# Altium PCB 模电.PcbDoc
Units mil, origin at the board's own origin, x right, y up, seen from the top; angles counter-clockwise.
Board outline 3910.01 x 3450.03 mil, 2 copper layers (Top Layer, Bottom Layer); 18 components, 14 nets, 46 pads, 0 vias.
Unrouted connection lines stored in the file: 1.
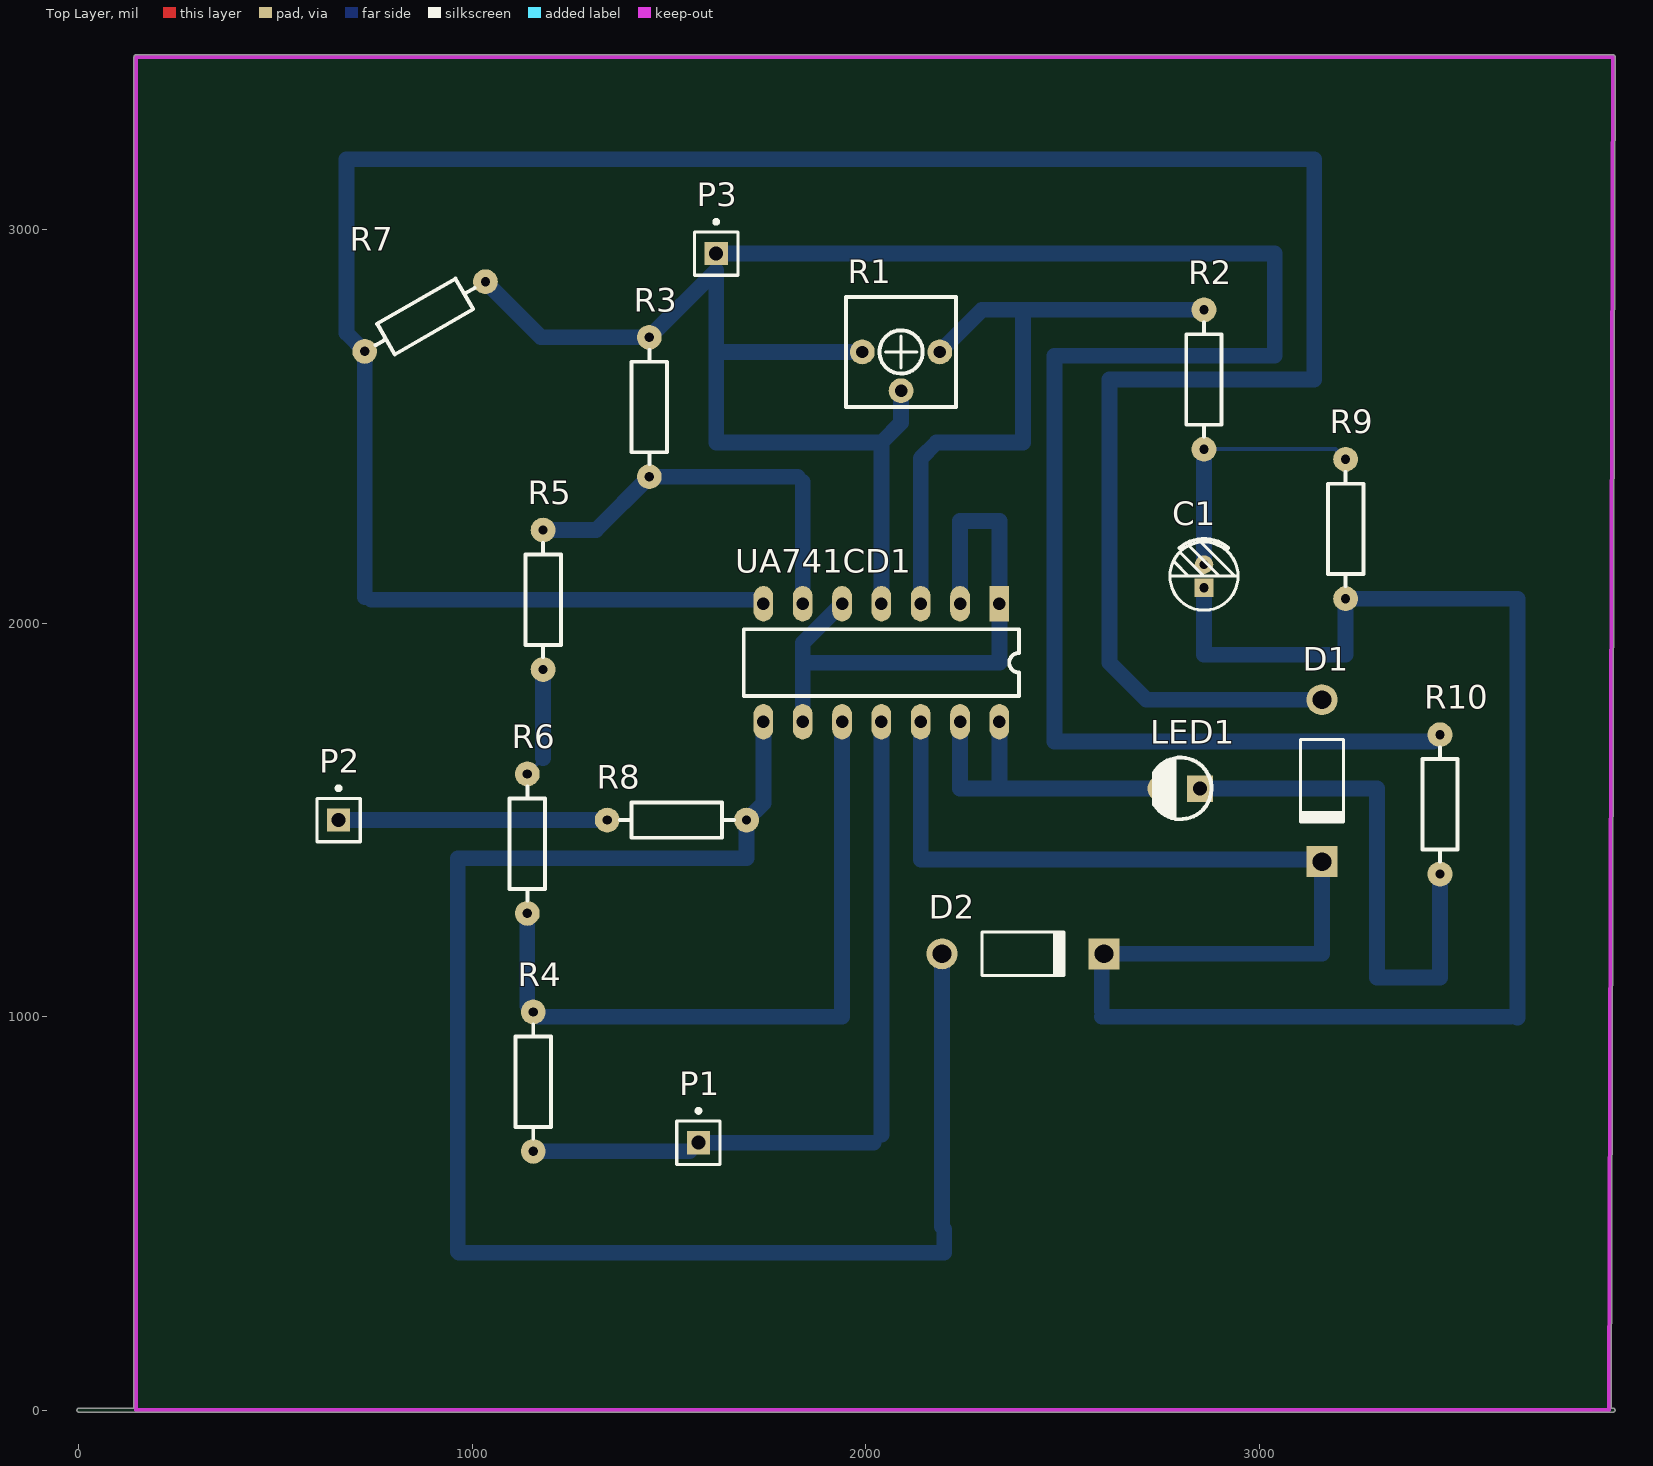
[diagram p0: Top Layer view]
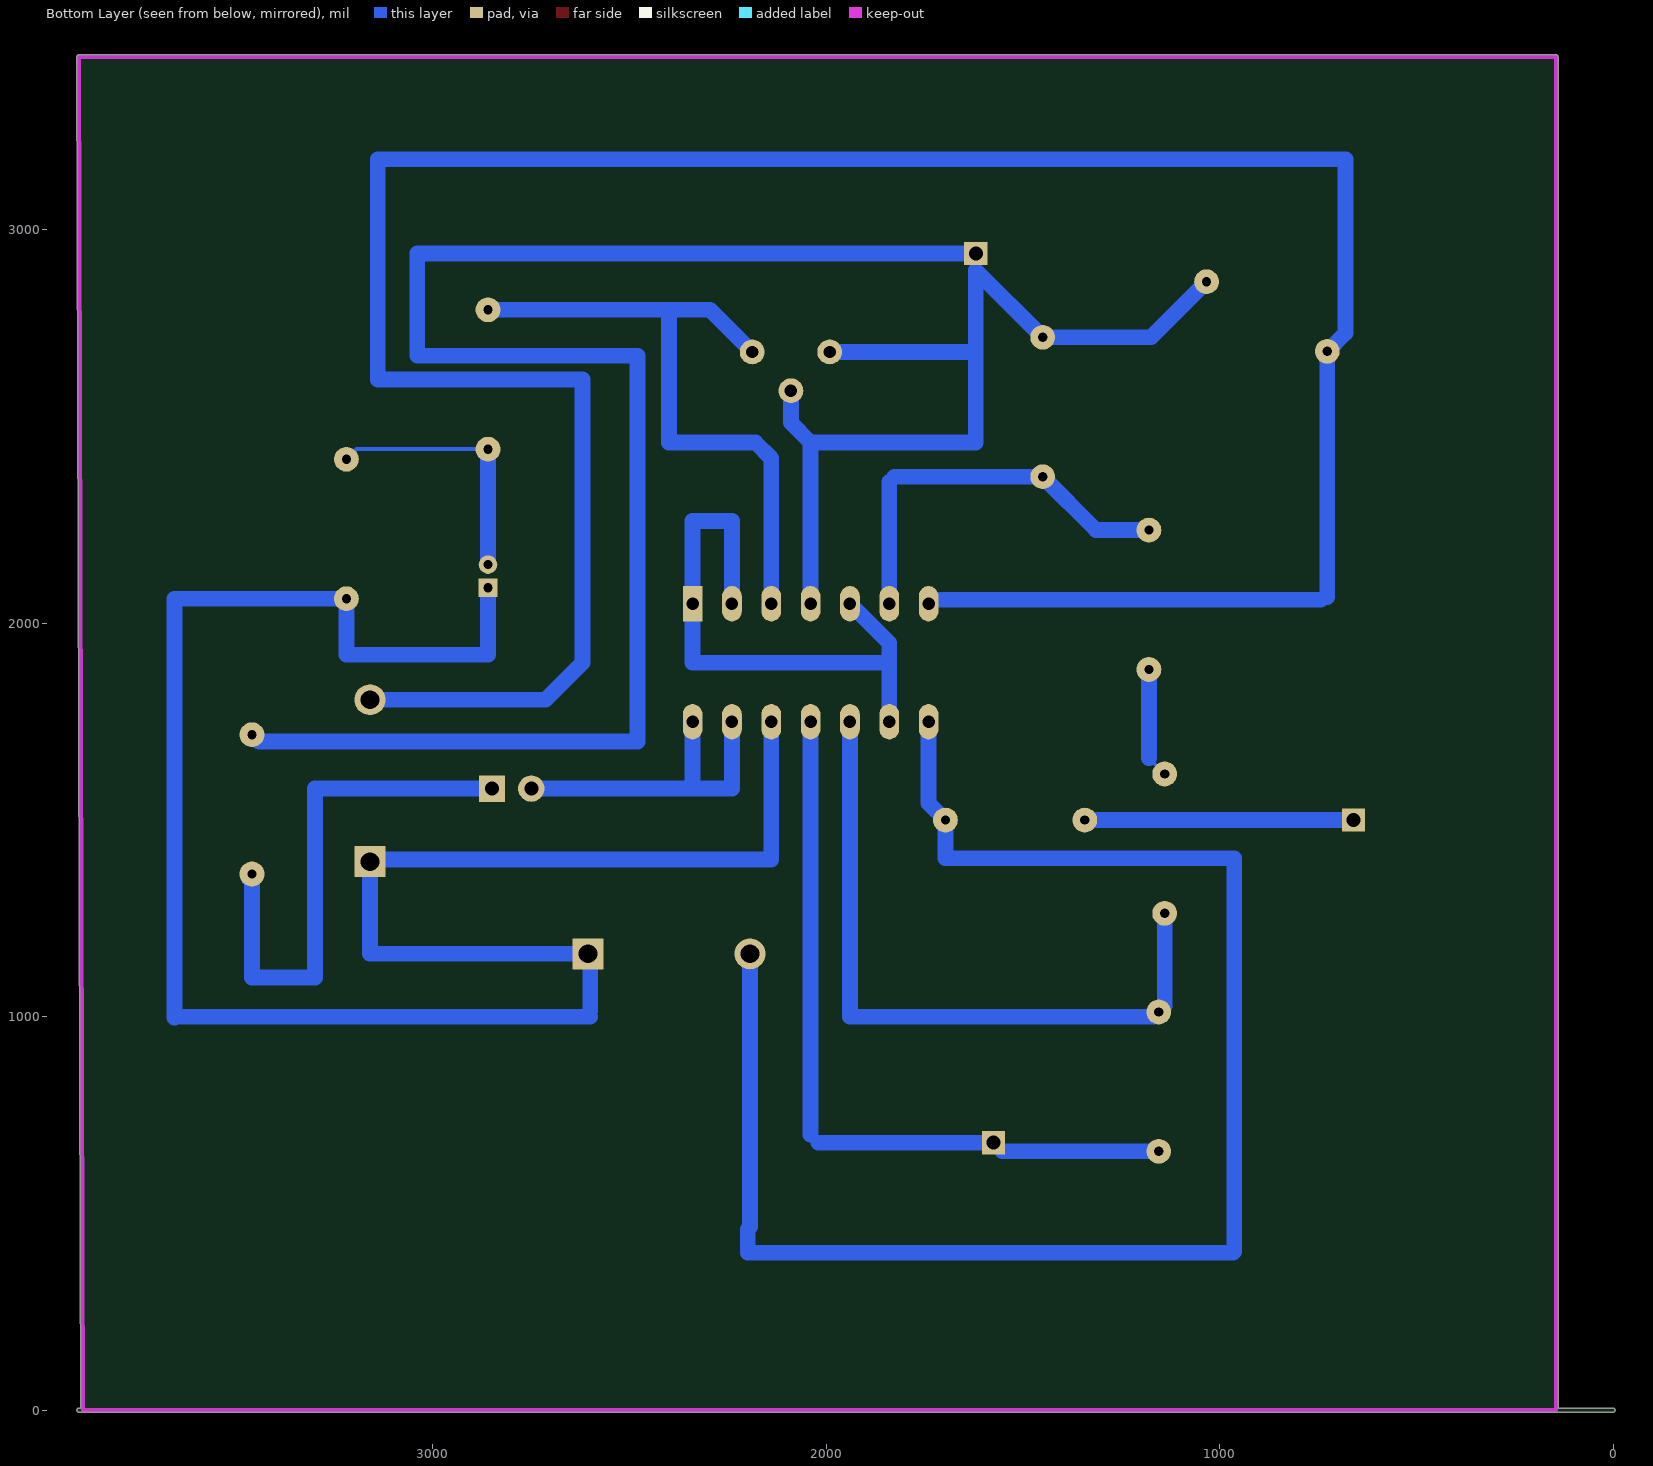
[diagram p1: Bottom Layer view, seen from below]
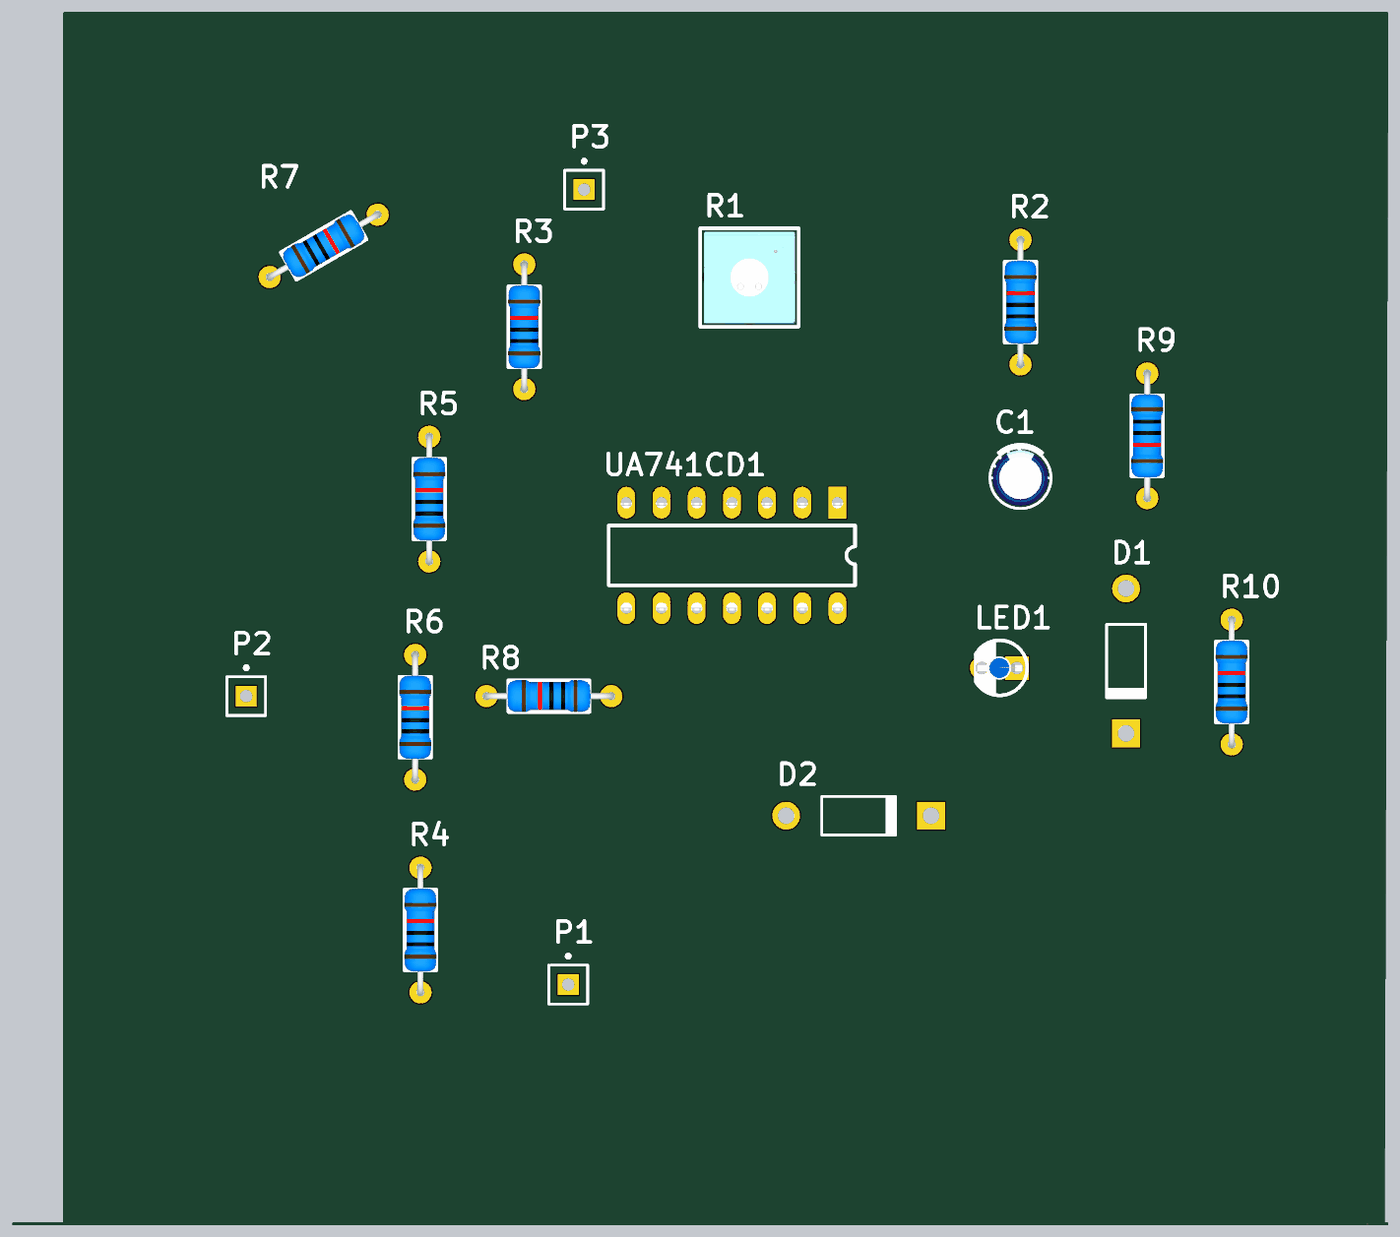
[diagram p2: 3D render of the assembled board from above, using the file's embedded part models]

## Layer stack, top to bottom
Top Layer: signal copper 1.4
Dielectric: dielectric 12.6, FR-4, Dk 4.8
Bottom Layer: signal copper 1.4

## Board outline
0,-5.01 cw(c0,0) 0,5.01 139.98,5.01 139.98,3440 cw(c145,3440) 145,3445.02 3900,3445.02 cw(c3900,3440) 3905.02,3440 cw(c3900,3440) 3905.02,3439.99 3895.03,5.01 3900,5.01 cw(c3900,0) 3905.02,0 cw(c3900,0) 3900,-5.01

## Design rules (kind name [scope] priority, off if disabled: settings)
Clearance [All] p1: gap=10
PolygonConnect [All] p1: connectstyle=Relief reliefconductorwidth=10 reliefentries=4 polygonreliefangle="90 Angle"
RoutingVias [All] p1: holewidth=28 width=50 viastyle="Through Hole" minholewidth=28 minwidth=50 maxholewidth=28 maxwidth=50
SilkscreenOverComponentPads [All] p1: minsilkscreentomaskgap=10
SolderMaskExpansion [All] p1: expansion=4
TestPointUsage FabricationTestPointUsage [All] p1: valid=0 allowmultiple=FALSE
Testpoint FabricationTestpoint [All] p1: side=3 testpointundercomponent=TRUE minsize=40 maxsize=100 preferedsize=60 minholesize=0 maxholesize=40 preferedholesize=32 testpointgrid=1 style=297 order=0123456789
Width [All] p1: maxlimit=10 minlimit=10 preferedwidth=10
23 further rules are at their usual default settings.

## Classes and differential pairs
component class 模电: C1 D1 D2 LED1 P1 P2 R1 R2 R3 R4 R5 R6 R7 R8 R9 R10 UA741CD1

## Components (designator, comment, footprint, x,y, rotation, side; value= is the part's Value field where it differs from the comment)
C1 "1uF" "CAP 1.5*4*8" 2860,2120 r90 top
D1 "Diode 1N4001" DO-41 3160,1600 r270 top
D2 "Diode 1N4001" DO-41 2400,1160 r0 top
LED1 "红色" "LED 3MM-B" 2800,1580 r180 top
P1 "Plug" PIN1 1575,680 r0 top
P2 "Plug" PIN1 660,1500 r0 top
P3 "Plug" PIN1 1620,2940 r0 top
R1 "100K" 3362P 2090,2690 r180 top
R2 "10K" "RS 1/4W" 2860,2620 r90 top
R3 "10K" "RS 1/4W" 1450,2550 r90 top
R4 "10K" "RS 1/4W" 1155,835 r90 top
R5 "100" "RS 1/4W" 1180,2060 r90 top
R6 "100" "RS 1/4W" 1140,1440 r90 top
R7 "10K" "RS 1/4W" 880,2780 r30 top
R8 "10K" "RS 1/4W" 1520,1500 r180 top
R9 "1M" "RS 1/4W" 3220,2240 r270 top
R10 "100" "RS 1/4W" 3460,1540 r90 top
UA741CD1 "LM324N" DIP14 2340,2050 r270 top

## Footprints (in the part's own frame and the unit in brackets; to place one, negate y for a bottom-side part, rotate by r counter-clockwise, add the part's x,y. Pads: shape width x height; smd on the part's side, far side on the other; paste and mask are expansions set on the pad)
3362P [mm]
  round 1.6 hole 0.8: 1(-2.5,0) 2(0,2.5) 3(2.5,0)
  silkscreen extent -3.56,-3.56 3.56,3.56, body extent -3.3,-3.3 3.3,3.3, height 4.74
"CAP 1.5*4*8" [mm]
  rect 1.2x1.2 hole 0.6: 1(-0.75,0)
  round 1.2 hole 0.6: 2(0.75,0)
  silkscreen extent -2.2,-2.2 2.41,2.2, body extent -2,-2 2.02,2, height 8.04
DIP14 [mil]
  rect 90x50 hole 32: 1(0,0)
  oval 90x50 hole 32: 2(0,-100) 3(0,-200) 4(0,-300) 5(0,-400) 6(0,-500) 7(0,-600) 8(300,-600) 9(300,-500) 10(300,-400) 11(300,-300) 12(300,-200) 13(300,-100) 14(300,0)
  silkscreen extent 65,-650 235,50, body extent 0,-682 308,82, height 180
DO-41 [mm] "Diode, Axial; Body 5.2 x 2.7 mm (LxDia. max), Lead Dia. 0.86 mm ("
  round 2 hole 1.2: 1(-5.23,0)
  rect 2x2 hole 1.2: 2(5.23,0)
  silkscreen extent -2.65,-1.4 2.75,1.4
"LED 3MM-B" [mm]
  rect 1.7x1.7 hole 0.9: 1(-1.27,0)
  round 1.7 hole 0.9: 2(1.27,0)
  silkscreen extent -2.01,-2 1.72,1.98, body extent -1.95,-1.95 1.64,1.95, height 5.55
PIN1 [mm] "Connector; Pl"
  rect 1.5x1.5 hole 0.9: 1(0,0)
  silkscreen extent -1.4,-1.4 1.4,2.17
"RS 1/4W" [mm]
  round 1.6 hole 0.6: 1(-4.5,0) 2(4.5,0)
  silkscreen extent -3.68,-1.14 3.68,1.14, body extent -4.72,-1.16 4.73,1.16, height 2.32

## Part data
D1 D2: "1 Amp General Purpose Rectifier"
LED1: library part LED-3MM
R1: library part RP-SMD, "贴片"
R2 R3 R4 R5 R6 R7 R8 R9 R10: library part R-CRR
UA741CD1: "Low Power Quad Operational Amplifier, 14-pin MDIP"

## Nets (pads, with @x,y where several pads share a name; then routed paths per layer and width w, separated by ;. In a path a pad name is that pad's centre, name@x,y a point inside that pad or via, vN(x,y) a via of type N, cw(c..) or ccw(c..) an arc to the next point about the centre after c; other vN are vias at no path point)
GND: P1.1 R4.1 UA741CD1.11 | length 1952.5
  Bottom Layer w10: P1.1@1552.83,657.83 P1.1 ; 2020,680 2040,700
  Bottom Layer w40: R4.1 P1.1@1552.83,657.83 ; P1.1 2020,680 ; 2040,700 UA741CD1.11
NetC1_1: C1.1 D1.2 D2.2 R9.2 UA741CD1.12 | length 5593.4
  Bottom Layer w10: D2.2@2582.83,1136.93 2600,1154.09 D2.2 ; D1.2@3145.91,1380 D1.2 D1.2@3154.09,1400 ; R9.2 R9.2@3237.17,2080
  Bottom Layer w40: UA741CD1.12 2140,1400 D1.2@3154.09,1400 ; 2600,1000 3640,1000 ; 2600,1014.33 D2.2@2600,1154.09 ; D2.2 3160,1160 D1.2 ; C1.1 2860,1920 3220,1920 R9.2 3657.17,2062.83 3657.17,997.17
NetC1_2: C1.2 R2.1 R9.1 | length 663.9
  Bottom Layer w10: R2.1 3194.33,2442.83 R9.1
  Bottom Layer w40: C1.2 R2.1
NetD1_1: D1.1 R7.1 UA741CD1.7 | length 6972.7
  Bottom Layer w10: UA741CD1.7@1730,2060 UA741CD1.7
  Bottom Layer w40: 726.57,2066.57 R7.1 680,2737.99 680,3180 3140,3180 3140,2620 2620,2620 2620,1900 2714.09,1805.91 D1.1 ; 743.14,2060 1040,2060 UA741CD1.7@1730,2060
NetD2_1: D2.1 R8.1 UA741CD1.8 | length 4116
  Bottom Layer w10: 962.83,402.83 965.67,400 ; 2182.83,682.83 2194.09,694.09 ; 2194.09,465.91 2200,460
  Bottom Layer w40: 962.83,402.83 962.83,482.83 962.83,1402.83 1697.17,1402.83 R8.1 1740,1542.83 UA741CD1.8 ; 965.67,400 2200,400 2200,460 ; 2194.09,465.91 2194.09,694.09 D2.1
NetLED1_1: LED1.1 R10.1 | length 1381.1
  Bottom Layer w10: R10.1 R10.1@3480,1342.83
  Bottom Layer w40: LED1.1 3300,1580 3300,1100 3460,1100 R10.1
NetLED1_2: LED1.2 UA741CD1.13 UA741CD1.14 | length 850
  Bottom Layer w40: UA741CD1.13 2240,1580 2340,1580 ; UA741CD1.14 2340,1580 ; LED1.2 2340,1580
NetR1_1: R1.1 R2.2 UA741CD1.3 | length 1708
  Bottom Layer w10: 2400,2777.17 2420,2797.17
  Bottom Layer w40: UA741CD1.3 2140,2420 2180,2460 2400,2460 2400,2777.17 ; R1.1 2295.59,2797.17 2420,2797.17 R2.2
NetR3_1: R3.1 R5.2 UA741CD1.6 | length 1031.5
  Bottom Layer w10: 1827.17,2372.83 1840,2360
  Bottom Layer w40: R5.2 1314.33,2237.17 R3.1 1827.17,2372.83 ; UA741CD1.6 1840,2360
NetR4_2: R4.2 R6.1 UA741CD1.10 | length 1821.2
  Bottom Layer w10: R4.2@1140,1027.17 R4.2 R4.2@1167.17,1000 ; R6.1 R6.1@1157.17,1280
  Bottom Layer w40: R4.2@1140,1027.17 R6.1 ; R4.2@1167.17,1000 1940,1000 UA741CD1.10
NetR5_1: R5.1 R6.2 | length 282.2
  Bottom Layer w10: R6.2 1180,1657.17
  Bottom Layer w40: 1180,1657.17 R5.1
NetUA741CD1_1: UA741CD1.1 UA741CD1.2 UA741CD1.5 UA741CD1.9 | length 1549.7
  Bottom Layer w10: UA741CD1.5@1940,2060 UA741CD1.5 UA741CD1.5@1960,2030
  Bottom Layer w40: UA741CD1.9 1840,1900 ; UA741CD1.5 1840,1950 1840,1900 ; UA741CD1.2 2240,2260 2340,2260 UA741CD1.1 2340,1900 1840,1900
VCC: P3.1 R1.2 R1.3 R3.2 R7.2 R10.2 UA741CD1.4 | length 6756.5
  Bottom Layer w10: 1620,2897.17 P3.1 ; R10.2@3442.83,1700 R10.2
  Bottom Layer w40: R7.2 1174.85,2727.17 R3.2 1620,2897.17 1620,2690 ; P3.1 3040,2940 3040,2680 2480,2680 2480,1700 R10.2@3442.83,1700 ; R1.3 1620,2690 ; UA741CD1.4 2040,2460 ; R1.2 2090,2510 2040,2460 ; 1620,2690 1620,2460 2040,2460
VDD: P2.1 R8.2 | length 682.8
  Bottom Layer w40: P2.1 R8.2
copper on no net: | length 5
  Top Layer w0: 3845,-5 3845,0

## Keep-outs
Keep-Out Layer:
  lines w10: 145,0 3890,0 3900,3440 145,3440 145,5